# Altium PCB 16CH.PcbDoc (part 1 of 2)
Units mm, origin at the board's own origin, x right, y up, seen from the top; angles counter-clockwise.
Board outline 152.4 x 101.6 mm, 2 copper layers (F.Cu, B.Cu); 147 components, 0 nets, 455 pads, 153 vias.
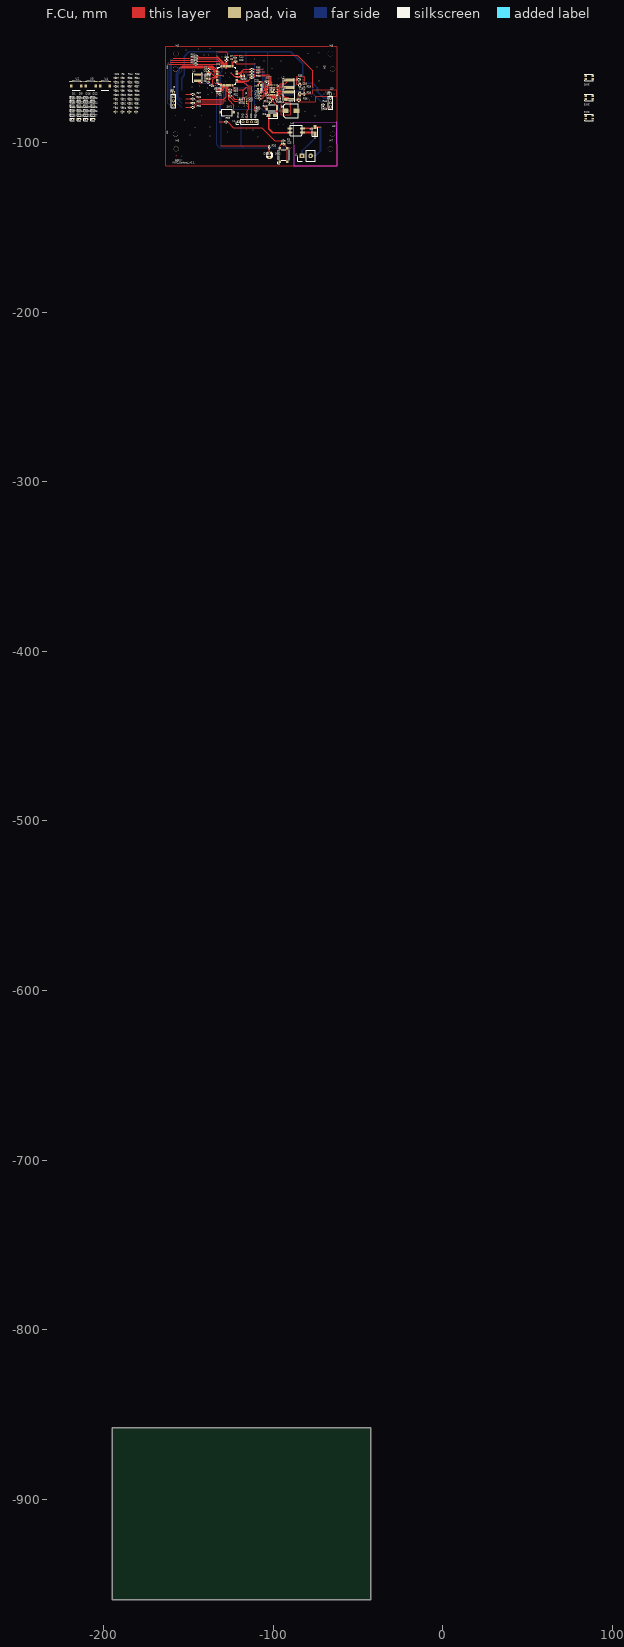
[diagram p0: F.Cu view]
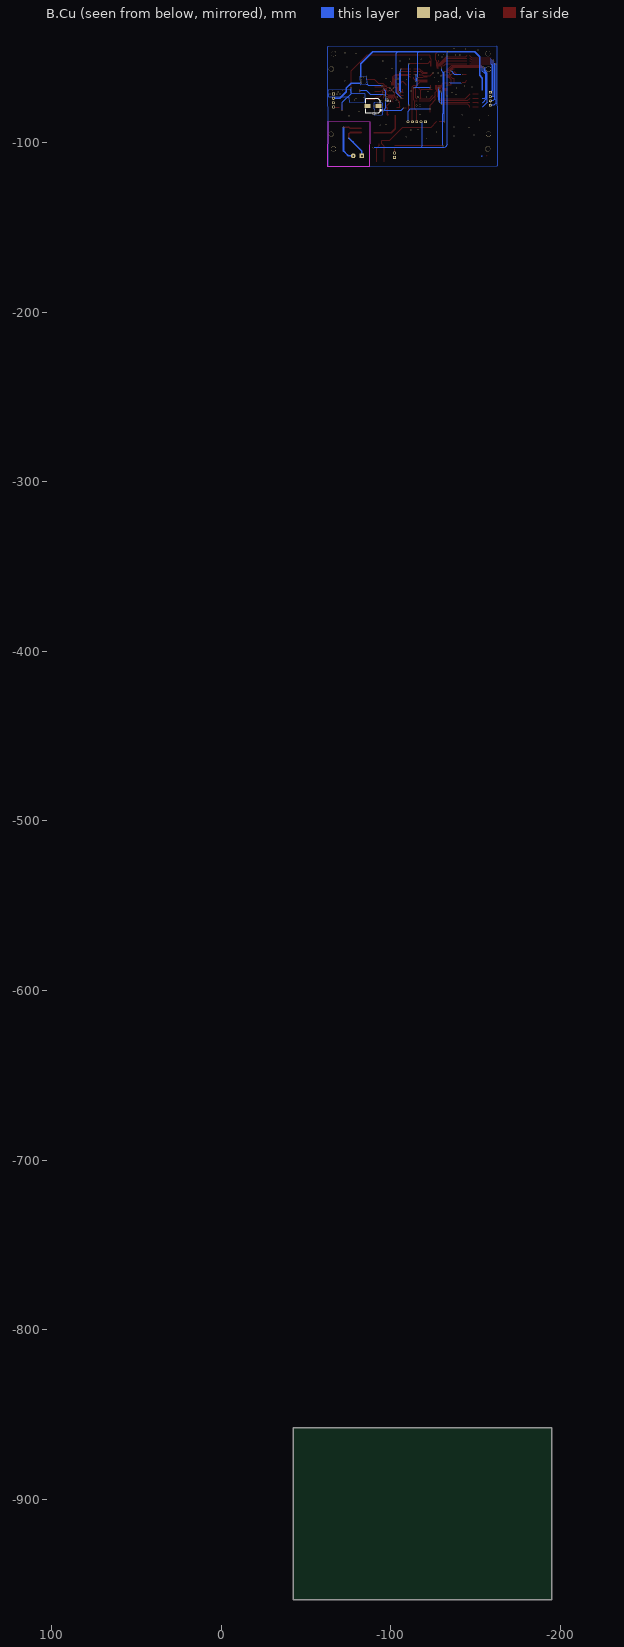
[diagram p1: B.Cu view, seen from below]

## Layer stack, top to bottom
F.Mask: solder mask 0.0102, Solder Resist, Dk 3.5
F.Cu: signal copper 0.0356
Dielectric 1: dielectric 0.32, FR-4, Dk 4.8
B.Cu: signal copper 0.0356
B.Mask: solder mask 0.0102, Solder Resist, Dk 3.5

## Board outline
-194.818,-959.231 -42.418,-959.231 -42.418,-857.631 -194.818,-857.631

## Design rules (kind name [scope] priority, off if disabled: settings)
Clearance "Clearence 0,5_Polygon" [InNamedPolygon('F.Cu--2') OR InNamedPolygon('B.Cu--2') OR InNamedPolygon('F.Cu--3') OR InNamedPolygon('B.Cu--3')] p1: gap=0.5 ignorepadtopadclearanceinfootprint=FALSE
Clearance "Clearence 0,4_Polygon" [InNamedPolygon('F.Cu--1') OR InNamedPolygon('B.Cu--1')] p2: gap=0.4 ignorepadtopadclearanceinfootprint=FALSE
Clearance "Clearence 0,3_Polygon" [InNamedPolygon('F.Cu-') OR InNamedPolygon('B.Cu-')] p3: gap=0.3 ignorepadtopadclearanceinfootprint=FALSE
Clearance "Clearence 0,01_NetClass" [InNetClass('Default')] p4: gap=0.01 ignorepadtopadclearanceinfootprint=FALSE
MinimumSolderMaskSliver [All] p1: minsoldermaskwidth=0
PolygonConnect Polygon_B.Cu--3_ConnectDirect [IsNamedPolygon('B.Cu--3') vs IsVia] p1: connectstyle=Direct reliefconductorwidth=0.254 reliefentries=4 polygonreliefangle="90 Angle" airgapwidth=0.254
PolygonConnect Polygon_B.Cu--3_ConnectRelief45 [IsNamedPolygon('B.Cu--3') vs (IsThruPin or IsSMTPin) and (PadShape_AllLayers = 'Round')] p2: connectstyle=Relief reliefconductorwidth=0.4 reliefentries=4 polygonreliefangle="45 Angle" airgapwidth=0.4
PolygonConnect Polygon_B.Cu--3_ConnectRelief90 [IsNamedPolygon('B.Cu--3') vs (IsThruPin or IsSMTPin) and (PadShape_AllLayers <> 'Round')] p3: connectstyle=Relief reliefconductorwidth=0.4 reliefentries=4 polygonreliefangle="90 Angle" airgapwidth=0.4
PolygonConnect Polygon_F.Cu--3_ConnectDirect [IsNamedPolygon('F.Cu--3') vs IsVia] p4: connectstyle=Direct reliefconductorwidth=0.254 reliefentries=4 polygonreliefangle="90 Angle" airgapwidth=0.254
PolygonConnect Polygon_F.Cu--3_ConnectRelief45 [IsNamedPolygon('F.Cu--3') vs (IsThruPin or IsSMTPin) and (PadShape_AllLayers = 'Round')] p5: connectstyle=Relief reliefconductorwidth=0.4 reliefentries=4 polygonreliefangle="45 Angle" airgapwidth=0.4
PolygonConnect Polygon_F.Cu--3_ConnectRelief90 [IsNamedPolygon('F.Cu--3') vs (IsThruPin or IsSMTPin) and (PadShape_AllLayers <> 'Round')] p6: connectstyle=Relief reliefconductorwidth=0.4 reliefentries=4 polygonreliefangle="90 Angle" airgapwidth=0.4
PolygonConnect Polygon_B.Cu--2_ConnectDirect [IsNamedPolygon('B.Cu--2') vs IsVia] p7: connectstyle=Direct reliefconductorwidth=0.254 reliefentries=4 polygonreliefangle="90 Angle" airgapwidth=0.254
PolygonConnect Polygon_B.Cu--2_ConnectRelief45 [IsNamedPolygon('B.Cu--2') vs (IsThruPin or IsSMTPin) and (PadShape_AllLayers = 'Round')] p8: connectstyle=Relief reliefconductorwidth=0.4 reliefentries=4 polygonreliefangle="45 Angle" airgapwidth=0.4
PolygonConnect Polygon_B.Cu--2_ConnectRelief90 [IsNamedPolygon('B.Cu--2') vs (IsThruPin or IsSMTPin) and (PadShape_AllLayers <> 'Round')] p9: connectstyle=Relief reliefconductorwidth=0.4 reliefentries=4 polygonreliefangle="90 Angle" airgapwidth=0.4
PolygonConnect Polygon_F.Cu--2_ConnectDirect [IsNamedPolygon('F.Cu--2') vs IsVia] p10: connectstyle=Direct reliefconductorwidth=0.254 reliefentries=4 polygonreliefangle="90 Angle" airgapwidth=0.254
PolygonConnect Polygon_F.Cu--2_ConnectRelief45 [IsNamedPolygon('F.Cu--2') vs (IsThruPin or IsSMTPin) and (PadShape_AllLayers = 'Round')] p11: connectstyle=Relief reliefconductorwidth=0.4 reliefentries=4 polygonreliefangle="45 Angle" airgapwidth=0.4
PolygonConnect Polygon_F.Cu--2_ConnectRelief90 [IsNamedPolygon('F.Cu--2') vs (IsThruPin or IsSMTPin) and (PadShape_AllLayers <> 'Round')] p12: connectstyle=Relief reliefconductorwidth=0.4 reliefentries=4 polygonreliefangle="90 Angle" airgapwidth=0.4
PolygonConnect Polygon_B.Cu--1_ConnectDirect [IsNamedPolygon('B.Cu--1') vs IsVia] p13: connectstyle=Direct reliefconductorwidth=0.254 reliefentries=4 polygonreliefangle="90 Angle" airgapwidth=0.254
PolygonConnect Polygon_B.Cu--1_ConnectRelief45 [IsNamedPolygon('B.Cu--1') vs (IsThruPin or IsSMTPin) and (PadShape_AllLayers = 'Round')] p14: connectstyle=Relief reliefconductorwidth=0.4 reliefentries=4 polygonreliefangle="45 Angle" airgapwidth=0.4
PolygonConnect Polygon_B.Cu--1_ConnectRelief90 [IsNamedPolygon('B.Cu--1') vs (IsThruPin or IsSMTPin) and (PadShape_AllLayers <> 'Round')] p15: connectstyle=Relief reliefconductorwidth=0.4 reliefentries=4 polygonreliefangle="90 Angle" airgapwidth=0.4
PolygonConnect Polygon_F.Cu--1_ConnectDirect [IsNamedPolygon('F.Cu--1') vs IsVia] p16: connectstyle=Direct reliefconductorwidth=0.254 reliefentries=4 polygonreliefangle="90 Angle" airgapwidth=0.254
PolygonConnect Polygon_F.Cu--1_ConnectRelief45 [IsNamedPolygon('F.Cu--1') vs (IsThruPin or IsSMTPin) and (PadShape_AllLayers = 'Round')] p17: connectstyle=Relief reliefconductorwidth=0.4 reliefentries=4 polygonreliefangle="45 Angle" airgapwidth=0.4
PolygonConnect Polygon_F.Cu--1_ConnectRelief90 [IsNamedPolygon('F.Cu--1') vs (IsThruPin or IsSMTPin) and (PadShape_AllLayers <> 'Round')] p18: connectstyle=Relief reliefconductorwidth=0.4 reliefentries=4 polygonreliefangle="90 Angle" airgapwidth=0.4
PolygonConnect Polygon_B.Cu-_ConnectDirect [IsNamedPolygon('B.Cu-') vs IsVia] p19: connectstyle=Direct reliefconductorwidth=0.254 reliefentries=4 polygonreliefangle="90 Angle" airgapwidth=0.254
PolygonConnect Polygon_B.Cu-_ConnectRelief45 [IsNamedPolygon('B.Cu-') vs (IsThruPin or IsSMTPin) and (PadShape_AllLayers = 'Round')] p20: connectstyle=Relief reliefconductorwidth=0.3 reliefentries=4 polygonreliefangle="45 Angle" airgapwidth=0.3
PolygonConnect Polygon_B.Cu-_ConnectRelief90 [IsNamedPolygon('B.Cu-') vs (IsThruPin or IsSMTPin) and (PadShape_AllLayers <> 'Round')] p21: connectstyle=Relief reliefconductorwidth=0.3 reliefentries=4 polygonreliefangle="90 Angle" airgapwidth=0.3
PolygonConnect Polygon_F.Cu-_ConnectDirect [IsNamedPolygon('F.Cu-') vs IsVia] p22: connectstyle=Direct reliefconductorwidth=0.254 reliefentries=4 polygonreliefangle="90 Angle" airgapwidth=0.254
PolygonConnect Polygon_F.Cu-_ConnectRelief45 [IsNamedPolygon('F.Cu-') vs (IsThruPin or IsSMTPin) and (PadShape_AllLayers = 'Round')] p23: connectstyle=Relief reliefconductorwidth=0.3 reliefentries=4 polygonreliefangle="45 Angle" airgapwidth=0.3
PolygonConnect Polygon_F.Cu-_ConnectRelief90 [IsNamedPolygon('F.Cu-') vs (IsThruPin or IsSMTPin) and (PadShape_AllLayers <> 'Round')] p24: connectstyle=Relief reliefconductorwidth=0.3 reliefentries=4 polygonreliefangle="90 Angle" airgapwidth=0.3
RoutingVias [All] p1: holewidth=0.711 width=1.27 viastyle="Through Hole" minholewidth=0.711 minwidth=1.27 maxholewidth=0.711 maxwidth=1.27
SilkToSilkClearance [All] p1: silktosilkclearance=0
SilkToSolderMaskClearance [IsPad] p1: minsilkscreentomaskgap=0 clearancetoexposedcopper=TRUE
SolderMaskExpansion [All] p1: expansion=0 istentingtop=FALSE
Width [All] p1: maxlimit=10 minlimit=0.254 preferedwidth=0.25 minimp=50.000000 maximp=50.000000 favimp=50.000000
27 further rules are at their usual default settings.

## Components (designator, comment, footprint, x,y, rotation, side; value= is the part's Value field where it differs from the comment)
C1 "Comment" C_0603_1608Metric#1 -138.203,-56.812 r0 top value=4.7uF
C2 "Comment" C_0603_1608Metric#1 -117.123,-61.142 r270 top value=1uF
C3 "Comment" C_0603_1608Metric#1 -136.453,-66.212 r0 top value=100nF
C4 "Comment" C_0603_1608Metric#1 -132.038,-70.992 r180 top value=100nF
C5 "Comment" C_0603_1608Metric#1 -118.963,-61.112 r270 top value=100nF
C6 "Comment" C_0603_1608Metric#1 -127.413,-51.492 r0 top value=100nF
C7 "Comment" C_0603_1608Metric#1 -127.393,-49.792 r0 top value=2.2uF
C8 "Comment" C_0603_1608Metric#1 -138.323,-64.402 r180 top value=15pF
C9 "Comment" C_0603_1608Metric#1 -138.323,-58.312 r180 top value=15pF
C10 "Comment" C_0603_1608Metric#1 -100.853,-74.552 r0 top value=47nF
C11 "Comment" C_0603_1608Metric#1 -97.893,-74.772 r270 top value=220nF
C12 "Comment" C_0603_1608Metric#1 -102.093,-76.322 r0 top value=100nF
C13 "Comment" C_0603_1608Metric#2 -97.853,-75.012 r180 bottom value=100nF
C14 "Comment" C_0603_1608Metric#1 -95.883,-74.772 r90 top value=1uF
C15 "Comment" C_0805_2012Metric -84.203,-66.112 r90 top value=10uF
C16 "Comment" C_0805_2012Metric -84.203,-71.232 r270 top value=10uF
C17 "Comment" C_0603_1608Metric#1 -103.783,-64.002 r0 top value=100nF
C18 "Comment" C_0603_1608Metric#1 -108.053,-74.162 r0 top value=100nF
C19 "Comment" C_0603_1608Metric#1 -108.053,-70.542 r180 top value=10pF
C20 "Comment" C_0603_1608Metric#1 -108.053,-64.202 r180 top value=10pF
C21 "Comment" C_0603_1608Metric#1 -125.403,-70.412 r180 top value=100nF
C22 "Comment" CP_Elec_8x10#1 -89.583,-81.242 r0 top value=100uF
C23 "Comment" C_0603_1608Metric#1 -122.103,-52.182 r180 top value=100nF
C24 "Comment" C_0603_1608Metric#1 -122.463,-49.992 r180 top value=100nF
C25 "Comment" C_0603_1608Metric#1 -94.003,-100.812 r0 top value=100nF
C26 "Comment" C_0603_1608Metric#1 -192.898,-61.667 r0 top value=100nF
C27 "Comment" C_0603_1608Metric#1 -192.898,-64.177 r0 top value=100nF
C28 "Comment" CP_Elec_8x10#2 -89.403,-78.462 r180 bottom value=470uf/16V
C29 "Comment" C_0603_1608Metric#1 -192.898,-66.687 r0 top value=100nF
C30 "Comment" C_0603_1608Metric#1 -192.898,-69.197 r0 top value=100nF
C31 "Comment" C_0603_1608Metric#1 -192.898,-71.707 r0 top value=100nF
C32 "Comment" C_0603_1608Metric#1 -192.898,-74.217 r0 top value=100nF
D1 "Comment" LED_0603_1608Metric -218.208,-73.327 r0 top value=LED
D2 "Comment" D_SMA -75.283,-92.859 r90 top value=SMAJ40CA-HT
D3 "Comment" D_SMA -100.826,-83.912 r180 top value=SS28
D4 "Comment" LED_0603_1608Metric -218.208,-75.917 r0 top value=LED
D5 "Comment" LED_0603_1608Metric -218.208,-78.507 r0 top value=LED
D6 "Comment" LED_0603_1608Metric -218.208,-81.097 r0 top value=LED
D7 "Comment" LED_0603_1608Metric -218.208,-83.687 r0 top value=LED
D8 "Comment" LED_0603_1608Metric -218.208,-86.277 r0 top value=LED
D9 "Comment" LED_0603_1608Metric -214.158,-73.327 r0 top value=LED
D10 "Comment" LED_0603_1608Metric -214.158,-75.917 r0 top value=LED
D11 "Comment" LED_D3.0mm -102.203,-108.682 r90 top value=Led_Green
D12 "Comment" LED_0603_1608Metric -214.158,-78.507 r0 top value=LED
D13 "Comment" LED_0603_1608Metric -214.158,-81.097 r0 top value=LED
D14 "Comment" LED_0603_1608Metric -214.158,-83.687 r0 top value=LED
D15 "Comment" LED_0603_1608Metric -214.158,-86.277 r0 top value=LED
D16 "Comment" LED_0603_1608Metric -210.108,-73.327 r0 top value=LED
D17 "Comment" LED_0603_1608Metric -210.108,-75.917 r0 top value=LED
D18 "Comment" LED_0603_1608Metric -210.108,-78.507 r0 top value=LED
D19 "Comment" LED_0603_1608Metric -210.108,-81.097 r0 top value=LED
D20 "Comment" LED_0603_1608Metric -210.108,-83.687 r0 top value=LED
D21 "Comment" LED_0603_1608Metric -210.108,-86.277 r0 top value=LED
D22 "Comment" LED_0603_1608Metric -206.058,-73.327 r0 top value=LED
D23 "Comment" LED_0603_1608Metric -206.058,-75.917 r0 top value=LED
D24 "Comment" LED_0603_1608Metric -206.058,-78.507 r0 top value=LED
D25 "Comment" LED_0603_1608Metric -206.058,-81.097 r0 top value=LED
D26 "Comment" LED_0603_1608Metric -206.058,-83.687 r0 top value=LED
D27 "Comment" LED_0603_1608Metric -206.058,-86.277 r0 top value=LED
H1 "Comment" MountingHole_3mm -157.633,-95.032 r90 top value=MountingHole
H2 "Comment" MountingHole_3mm -64.853,-95.032 r90 top value=MountingHole
H3 "Comment" MountingHole_3mm -64.853,-56.682 r90 top value=MountingHole
H4 "Comment" MountingHole_3mm -157.633,-56.682 r90 top value=MountingHole
H5 "Comment" MountingHole_3mm -157.243,-47.622 r0 top value=MountingHole
H6 "Comment" MountingHole_3mm -157.243,-103.722 r0 top value=MountingHole
H7 "Comment" MountingHole_3mm -66.303,-103.722 r0 top value=MountingHole
H8 "Comment" MountingHole_3mm -66.303,-47.622 r0 top value=MountingHole
IC1 "Comment" LQFP-64_10x10mm_P0.5mm -127.218,-60.582 r0 top value=R7FA2L1AB3CFM
J1 "Comment" Samtec_HPM-02-01-x-S_Straight_1x02_Pitch5.08mm -82.948,-107.812 r90 top value=L-KLS8-2170-13
J2 "Comment" PinHeader_1x05_P2.54mm_Vertical -120.363,-87.712 r90 top value=Conn_01x05
J3 "Comment" Tag-Connect_TC2030-IDC-NL_2x03_P1.27mm_Vertical -116.238,-75.582 r270 top value=Conn_ARM_SWD_TagConnect_TC2030-NL
J9 "Comment" PinHeader_1x04_P2.54mm_Vertical -158.695,-70.327 r0 top value=Conn_01x04
J10 "Comment" PinHeader_1x04_P2.54mm_Vertical -66.196,-71.402 r0 top value=Conn_01x04
JP1 "Comment" SolderJumper-2_P1.3mm_Open_TrianglePad1.0x1.5mm -132.003,-68.812 r0 top value=SolderJumper_2_Open
L1 "Comment" L_APV_ANR5012 -144.623,-61.722 r270 top value=4.7uH
L2 "Comment" L_APV_ANR6028 -90.683,-65.262 r90 top value=220uH
L3 "Comment" L_APV_ANR6028 -90.643,-72.422 r270 top value=220uH
L4 "Comment" L_CommonMode_50474C_7.5x5.9mm -86.323,-92.859 r180 top value=50474C
R1 "Comment" R_0603_1608Metric -192.898,-76.727 r0 top value=10k
R2 "Comment" R_0603_1608Metric -192.898,-79.237 r0 top value=330R
R3 "Comment" R_0603_1608Metric -93.978,-98.912 r180 top value=10K
R4 "Comment" R_0603_1608Metric -192.898,-81.747 r0 top value=330R
R5 "Comment" R_0603_1608Metric -188.888,-61.667 r0 top value=330R
R6 "Comment" R_0603_1608Metric -188.888,-64.177 r0 top value=10k
R7 "Comment" R_0603_1608Metric -188.888,-66.687 r0 top value=10k
R8 "Comment" R_0603_1608Metric -188.888,-69.197 r0 top value=1k
R9 "Comment" R_0603_1608Metric -188.888,-71.707 r0 top value=1k
R10 "Comment" R_0603_1608Metric -188.888,-74.217 r0 top value=1k
R11 "Comment" R_0603_1608Metric -188.888,-76.727 r0 top value=1k
R12 "Comment" R_0603_1608Metric -188.888,-79.237 r0 top value=1k
R13 "Comment" R_0603_1608Metric -188.888,-81.747 r0 top value=1k
R14 "Comment" R_0603_1608Metric -184.878,-61.667 r0 top value=1k
R15 "Comment" R_0603_1608Metric -184.878,-64.177 r0 top value=1k
R16 "Comment" R_0603_1608Metric -184.878,-66.687 r0 top value=1k
R17 "Comment" R_0603_1608Metric -184.878,-69.197 r0 top value=1k
R18 "Comment" R_0603_1608Metric -184.878,-71.707 r0 top value=1k
R19 "Comment" R_0603_1608Metric -184.878,-74.217 r0 top value=1k
R20 "Comment" R_0603_1608Metric -184.878,-76.727 r0 top value=1k
R21 "Comment" R_0603_1608Metric -184.878,-79.237 r0 top value=1k
R22 "Comment" R_0603_1608Metric -184.878,-81.747 r0 top value=1k
R23 "Comment" R_0603_1608Metric -180.868,-61.667 r0 top value=1k
R24 "Comment" R_0603_1608Metric -180.868,-64.177 r0 top value=1k
R25 "Comment" R_0603_1608Metric -180.868,-66.687 r0 top value=1k
R26 "Comment" R_0603_1608Metric -102.203,-102.712 r270 top value=1K
R27 "Comment" R_0603_1608Metric -180.868,-69.197 r0 top value=1k
R28 "Comment" R_0603_1608Metric -180.868,-71.707 r0 top value=1k
R29 "Comment" R_0603_1608Metric -180.868,-74.217 r0 top value=1k
R30 "Comment" R_0603_1608Metric -180.868,-76.727 r0 top value=1k
R31 "Comment" R_0603_1608Metric -180.868,-79.237 r0 top value=1k
R32 "Comment" R_0603_1608Metric -125.413,-72.412 r0 top value=10K
R33 "Comment" R_0603_1608Metric -125.403,-68.812 r0 top value=10K
R34 "Comment" R_2512_6332Metric -100.803,-79.412 r180 top value=27R
R35 "Comment" R_0805_2012Metric -84.903,-62.812 r0 top value=1R
R36 "Comment" R_0805_2012Metric -84.903,-74.812 r0 top value=1R
R37 "Comment" R_0603_1608Metric -180.868,-81.747 r0 top value=1k
R38 "Comment" R_0603_1608Metric -81.713,-71.262 r90 top value=91K
R39 "Comment" R_0603_1608Metric -81.713,-67.872 r90 top value=10K
R40 "Comment" R_0603_1608Metric -108.053,-72.452 r0 top value=20k
R41 "Comment" R_0603_1608Metric -109.903,-79.612 r180 top value=220k
R42 "Comment" R_0603_1608Metric -109.903,-81.312 r0 top value=27k
R43 "Comment" R_0603_1608Metric -70.483,-79.522 r180 top value=100k
R44 "Comment" R_0603_1608Metric -70.503,-77.712 r0 top value=27k
R87 "Comment" R_0603_1608Metric -147.403,-71.572 r180 top value=33R
R88 "Comment" R_0603_1608Metric -147.403,-74.112 r180 top value=33R
R89 "Comment" R_0603_1608Metric -147.403,-76.652 r180 top value=33R
R90 "Comment" R_0603_1608Metric -147.403,-79.192 r180 top value=33R
R91 "Comment" R_0603_1608Metric -145.603,-48.812 r180 top value=33R
R92 "Comment" R_0603_1608Metric -145.603,-50.445 r180 top value=33R
R93 "Comment" R_0603_1608Metric -145.603,-52.078 r180 top value=33R
R94 "Comment" R_0603_1608Metric -145.603,-53.712 r180 top value=33R
R95 "Comment" R_0603_1608Metric -112.578,-58.312 r180 top value=33R
R96 "Comment" R_0603_1608Metric -112.578,-56.712 r180 top value=33R
R97 "Comment" R_0603_1608Metric -112.578,-59.942 r180 top value=33R
R98 "Comment" R_0603_1608Metric -112.578,-61.612 r180 top value=33R
R99 "Comment" R_0603_1608Metric -127.703,-87.712 r180 top value=330R
REF** "Comment" LayerMarker_4_6.35x2.54mm_TextH1mm_P1.27mm_Named_BottomMirrored -157.203,-110.062 r0 top value=LayerMarker_4_6.35x2.54mm_TextH1mm_P1.27mm_Named_BottomMirrored
SW1 "Comment" SW_SPST_CK_RS282G05A3 -127.103,-82.212 r180 top value=SW_Push
SW2 "Comment" SW_SPST_Omron_B3FS-100xP -93.853,-107.312 r90 top value=SW_Push
SW3 "Comment" L-KLS7-TS3402-2.5 86.276,-73.382 r180 top value=SW_MEC_5G
SW4 "Comment" L-KLS7-TS3402-2.5 86.326,-85.132 r0 top value=SW_MEC_5G
SW5 "Comment" L-KLS7-TS3402-2.5 86.276,-61.632 r180 top value=SW_MEC_5G
U1 "Comment" QFN40_485AU-01_ONS -100.463,-68.972 r90 top value=NCN5130MNTWG
U2 "Comment" TSSOP-16_4.4x5mm_P0.65mm -216.028,-66.312 r0 top value=74HC595PW,118
U3 "Comment" TSSOP-16_4.4x5mm_P0.65mm -207.578,-66.312 r0 top value=74HC595PW,118
U4 "Comment" TSSOP-16_4.4x5mm_P0.65mm -199.128,-66.312 r0 top value=74HC595PW,118
Y1 "Comment" Crystal_SMD_SeikoEpson_FA238-4Pin_3.2x2.5mm -138.323,-61.357 r270 top value=20Mhz
Y2 "Comment" Crystal_SMD_SeikoEpson_FA238V-4Pin_3.2x2.5mm -108.053,-67.362 r90 top value=16Mhz

## Footprints (in the part's own frame and the unit in brackets; to place one, negate y for a bottom-side part, rotate by r counter-clockwise, add the part's x,y. Pads: shape width x height; smd on the part's side, far side on the other; paste and mask are expansions set on the pad)
C_0603_1608Metric#1 [mm]
  rrect25% 0.9x0.95 smd mask+0.05: 1(-0.775,0) 2(0.775,0)
  silkscreen extent -0.14,-0.51 0.14,0.51
C_0603_1608Metric#2 [mm]
  rrect25% 0.9x0.95 smd mask+0.05: 1(0.775,0) 2(-0.775,0)
  silkscreen extent -0.14,-0.51 0.14,0.51
C_0805_2012Metric [mm]
  rrect25% 1x1.45 smd mask+0.05: 1(-0.95,0) 2(0.95,0)
  silkscreen extent -0.26,-0.73 0.26,0.73
CP_Elec_8x10#1 [mm]
  rrect10% 3.5x2.5 smd mask+0.05: 1(-3.25,0) 2(3.25,0)
  silkscreen extent -5.5,-4.26 4.26,4.26
CP_Elec_8x10#2 [mm]
  rrect10% 3.5x2.5 smd mask+0.05: 1(3.25,0) 2(-3.25,0)
  silkscreen extent -4.26,-4.26 5.5,4.26
Crystal_SMD_SeikoEpson_FA238-4Pin_3.2x2.5mm [mm]
  rect 1.4x1.2 smd mask+0.05: 1(-1.1,-0.8) 2(1.1,0.8) 3(1.1,-0.8) 4(-1.1,0.8)
  silkscreen extent -2,-1.6 2,1.6
Crystal_SMD_SeikoEpson_FA238V-4Pin_3.2x2.5mm [mm]
  rect 1.4x1.2 smd mask+0.05: 1(-1.2,-0.95) 2(1.2,-0.95) 3(1.2,0.95) 4(-1.2,0.95)
  silkscreen extent -2.1,-1.75 2.1,1.75
D_SMA [mm]
  rrect14% 2.5x1.8 smd mask+0.05: 1(-2,0) 2(2,0)
  silkscreen extent -3.51,-1.65 2,1.65
L-KLS7-TS3402-2.5 [mm]
  rrect25% 1.45x1.1 smd mask+0.05: 1(-2.05,0.85) 2(-2.05,-0.85)
  rrect25% 1.45x1 smd mask+0.05: 3(2,-0.9) 4(2,0.9)
  silkscreen extent -2.48,-1.86 2.43,1.86
L_APV_ANR5012 [mm]
  rrect18% 1.4x4.2 smd mask+0.05: 1(-1.85,0) 2(1.85,0)
  silkscreen extent -2.76,-2.76 2.76,2.76
L_APV_ANR6028 [mm]
  rrect15% 1.7x5.7 smd mask+0.05: 1(-2.25,0) 2(2.25,0)
  silkscreen extent -3.26,-3.26 3.26,3.26
L_CommonMode_50474C_7.5x5.9mm [mm]
  rrect20% 3x1.2 smd mask+0.05: 1(-3.75,1.25) 2(-3.75,-1.25) 3(3.75,-1.25) 4(3.75,1.25)
  silkscreen extent -3.5,-3.14 3.5,3
LayerMarker_4_6.35x2.54mm_TextH1mm_P1.27mm_Named_BottomMirrored [mm]
LED_0603_1608Metric [mm]
  rrect25% 0.875x0.95 smd mask+0.05: 1(-0.787,0) 2(0.787,0)
  silkscreen extent -1.49,-0.73 0.8,0.73
LED_D3.0mm [mm]
  rect 1.8x1.8 hole 0.9 mask+0.05: 1(0,0)
  round 1.8 hole 0.9 mask+0.05: 2(2.54,0)
  silkscreen extent -0.29,-1.99 2.94,1.99
LQFP-64_10x10mm_P0.5mm [mm]
  rrect25% 1.55x0.3 smd mask+0.05: 1(-5.675,3.75) 2(-5.675,3.25) 3(-5.675,2.75) 4(-5.675,2.25) 5(-5.675,1.75) 6(-5.675,1.25) 7(-5.675,0.75) 8(-5.675,0.25) 9(-5.675,-0.25) 10(-5.675,-0.75) 11(-5.675,-1.25) 12(-5.675,-1.75) 13(-5.675,-2.25) 14(-5.675,-2.75) 15(-5.675,-3.25) 16(-5.675,-3.75) 33(5.675,-3.75) 34(5.675,-3.25) 35(5.675,-2.75) 36(5.675,-2.25) 37(5.675,-1.75) 38(5.675,-1.25) 39(5.675,-0.75) 40(5.675,-0.25) 41(5.675,0.25) 42(5.675,0.75) 43(5.675,1.25) 44(5.675,1.75) 45(5.675,2.25) 46(5.675,2.75) 47(5.675,3.25) 48(5.675,3.75)
  rrect25% 0.3x1.55 smd mask+0.05: 17(-3.75,-5.675) 18(-3.25,-5.675) 19(-2.75,-5.675) 20(-2.25,-5.675) 21(-1.75,-5.675) 22(-1.25,-5.675) 23(-0.75,-5.675) 24(-0.25,-5.675) 25(0.25,-5.675) 26(0.75,-5.675) 27(1.25,-5.675) 28(1.75,-5.675) 29(2.25,-5.675) 30(2.75,-5.675) 31(3.25,-5.675) 32(3.75,-5.675) 49(3.75,5.675) 50(3.25,5.675) 51(2.75,5.675) 52(2.25,5.675) 53(1.75,5.675) 54(1.25,5.675) 55(0.75,5.675) 56(0.25,5.675) 57(-0.25,5.675) 58(-0.75,5.675) 59(-1.25,5.675) 60(-1.75,5.675) 61(-2.25,5.675) 62(-2.75,5.675) 63(-3.25,5.675) 64(-3.75,5.675)
  silkscreen extent -6.06,-5.11 5.11,5.11
MountingHole_3mm [mm]
  round 3 hole 3 mask+0.05: Un1(0,0)
PinHeader_1x04_P2.54mm_Vertical [mm]
  rect 1.7x1.7 hole 1 mask+0.05: 1(0,0)
  round 1.7 hole 1 mask+0.05: 2(0,-2.54) 3(0,-5.08) 4(0,-7.62)
  silkscreen extent -1.38,-9 1.38,1.38
PinHeader_1x05_P2.54mm_Vertical [mm]
  rect 1.7x1.7 hole 1 mask+0.05: 1(0,0)
  round 1.7 hole 1 mask+0.05: 2(0,-2.54) 3(0,-5.08) 4(0,-7.62) 5(0,-10.16)
  silkscreen extent -1.38,-11.54 1.38,1.38
QFN40_485AU-01_ONS [mil]
  rect 32x10 smd mask+1.97: 1(-114,88.58) 2(-114,68.9) 3(-114,49.21) 4(-114,29.53) 5(-114,9.84) 6(-114,-9.84) 7(-114,-29.53) 8(-114,-49.21) 9(-114,-68.9) 10(-114,-88.58) 21(114,-88.58) 22(114,-68.9) 23(114,-49.21) 24(114,-29.53) 25(114,-9.84) 26(114,9.84) 27(114,29.53) 28(114,49.21) 29(114,68.9) 30(114,88.58)
  rect 10x32 smd mask+1.97: 11(-88.58,-114) 12(-68.9,-114) 13(-49.21,-114) 14(-29.53,-114) 15(-9.84,-114) 16(9.84,-114) 17(29.53,-114) 18(49.21,-114) 19(68.9,-114) 20(88.58,-114) 31(88.58,114) 32(68.9,114) 33(49.21,114) 34(29.53,114) 35(9.84,114) 36(-9.84,114) 37(-29.53,114) 38(-49.21,114) 39(-68.9,114) 40(-88.58,114)
  rect 130x130 smd mask+1.97: 41(0,0)
  silkscreen extent -150,-150 150,150
R_0603_1608Metric [mm]
  rrect25% 0.8x0.95 smd mask+0.05: 1(-0.825,0) 2(0.825,0)
  silkscreen extent -0.24,-0.52 0.24,0.52
R_0805_2012Metric [mm]
  rrect24% 1.025x1.4 smd mask+0.05: 1(-0.913,0) 2(0.913,0)
  silkscreen extent -0.23,-0.73 0.23,0.73
R_2512_6332Metric [mm]
  rrect20% 1.225x3.35 smd mask+0.05: 1(-2.963,0) 2(2.963,0)
  silkscreen extent -2.18,-1.71 2.18,1.71
Samtec_HPM-02-01-x-S_Straight_1x02_Pitch5.08mm [mm]
  rect 2.8x2.8 hole 1.1 mask+0.05: 1(0,0)
  round 2.8 hole 1.1 mask+0.05: 2(0,-5.08)
  silkscreen extent -3.28,-7.73 3.28,2.65
SolderJumper-2_P1.3mm_Open_TrianglePad1.0x1.5mm [mm]
  rect 0.3x0.3 smd paste-0.3 mask+0.05: 1(-0.725,0) 2(0.725,0)
  F.Cu region: 1.225,-0.75 0.075,-0.75 0.575,0 0.075,0.75 1.225,0.75
  F.Cu region: 0.275,0 -0.225,-0.75 -1.225,-0.75 -1.225,0.75 -0.225,0.75
  silkscreen extent -1.4,-1 1.4,1
SW_SPST_CK_RS282G05A3 [mm]
  rect 1.5x1.5 smd mask+0.05: 1(-3.9,0) 2(3.9,0)
  silkscreen extent -3.06,-1.85 3.06,1.85
SW_SPST_Omron_B3FS-100xP [mm]
  rect 1.6x1.4 smd mask+0.05: 1(-4,2.25) 1(4,2.25) 2(-4,-2.25) 2(4,-2.25)
  silkscreen extent -5.1,-3.25 3.1,3.3
Tag-Connect_TC2030-IDC-NL_2x03_P1.27mm_Vertical [mil]
  round 31 smd paste-31 mask+1.97: 1(-50,-25) 2(-50,25) 3(0,-25) 4(0,25) 5(50,-25) 6(50,25)
  round 39 hole 39 mask+1.97: Un1(-100,0) Un2(100,40) Un3(100,-40)
  silkscreen extent -75,-50 -50,-25
TSSOP-16_4.4x5mm_P0.65mm [mm]
  rrect25% 1.475x0.4 smd mask+0.05: 1(-2.863,2.275) 2(-2.863,1.625) 3(-2.863,0.975) 4(-2.863,0.325) 5(-2.863,-0.325) 6(-2.863,-0.975) 7(-2.863,-1.625) 8(-2.863,-2.275) 9(2.863,-2.275) 10(2.863,-1.625) 11(2.863,-0.975) 12(2.863,-0.325) 13(2.863,0.325) 14(2.863,0.975) 15(2.863,1.625) 16(2.863,2.275)
  silkscreen extent -4.19,-2.74 2.31,2.74